# Altium PCB RFA433_r1.PcbDoc
Units mm, origin at the board's own origin, x right, y up, seen from the top; angles counter-clockwise.
Board outline 42.5 x 50 mm, 2 copper layers (Top Layer, Bottom Layer); 29 components, 13 nets, 74 pads, 47 vias.
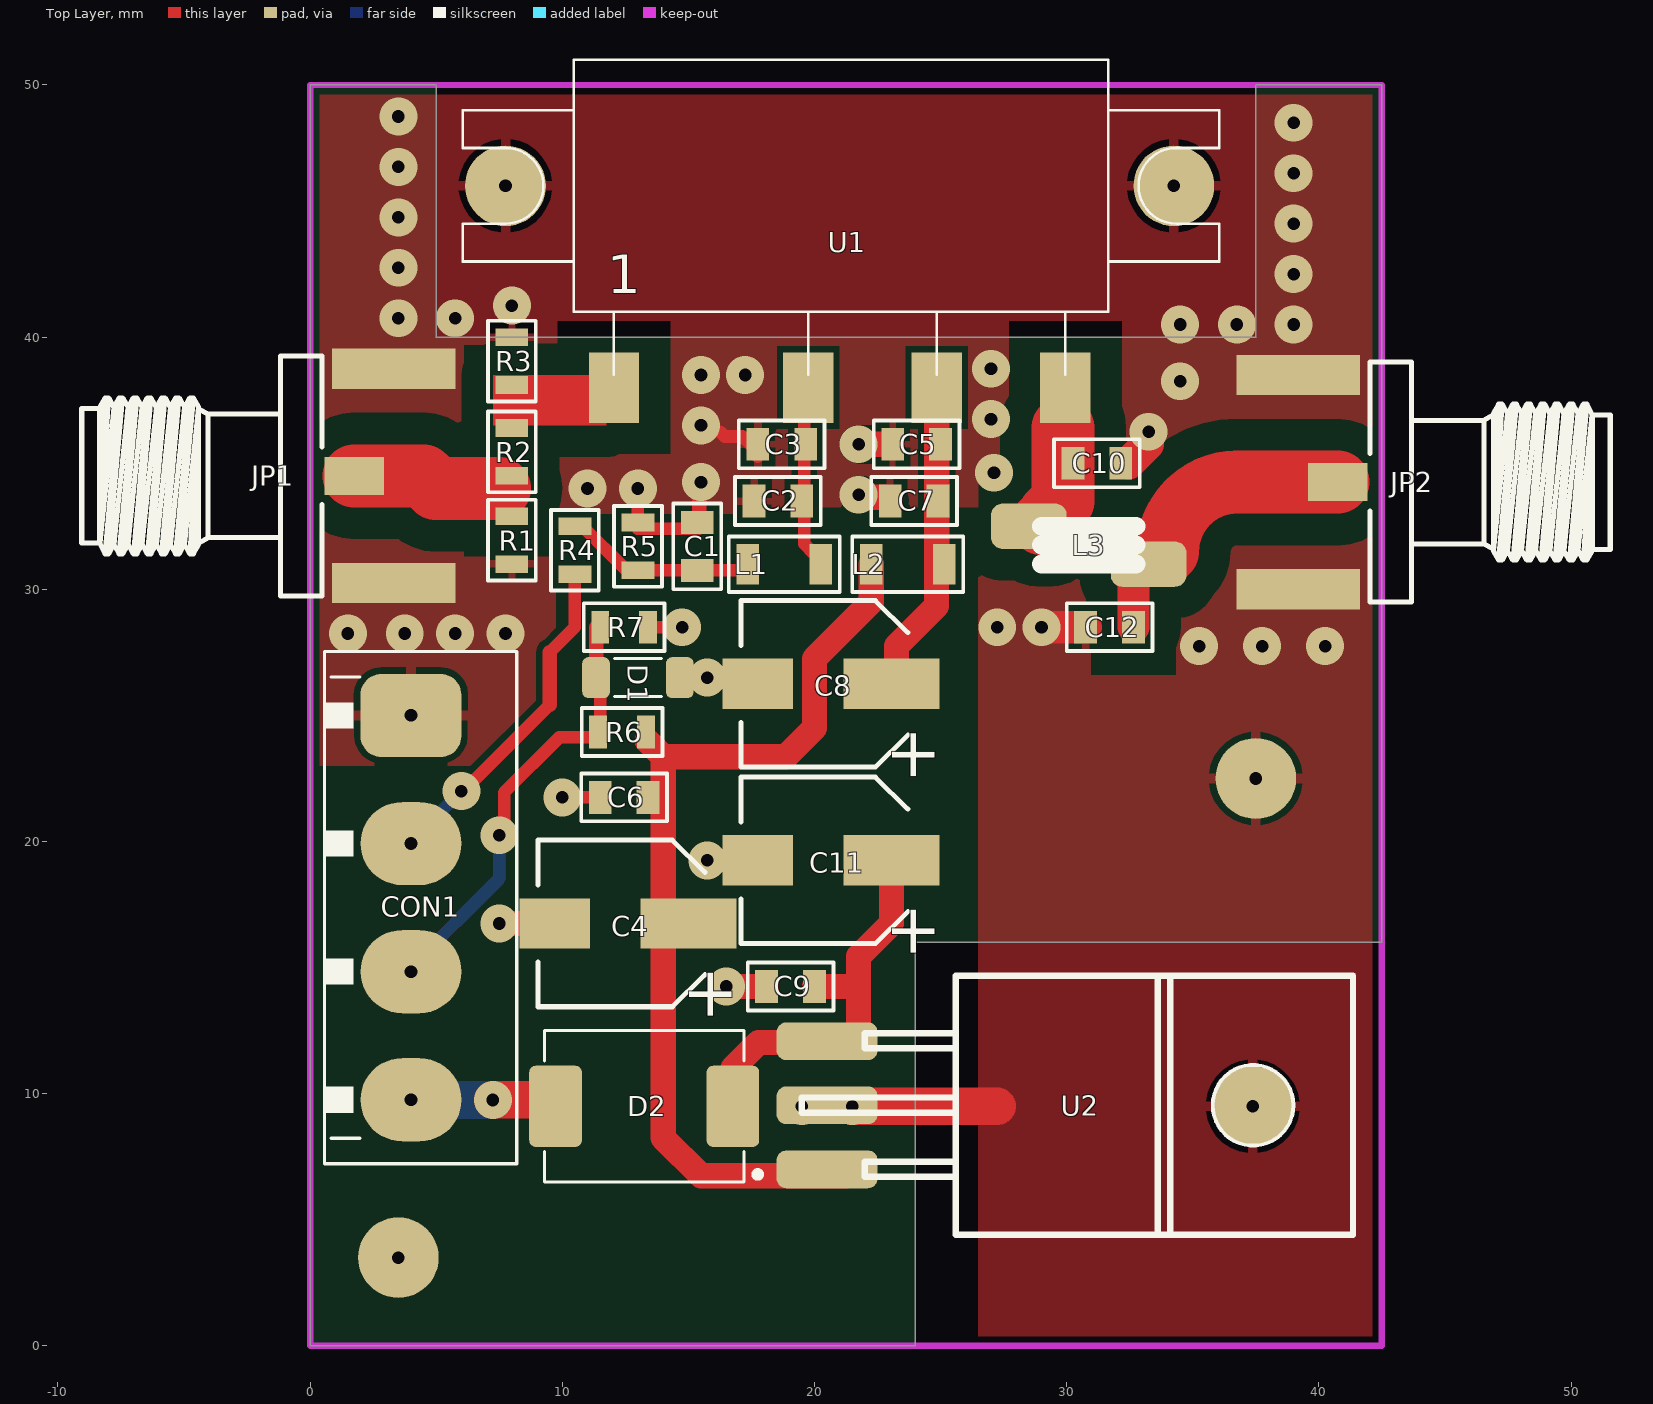
[diagram p0: Top Layer view]
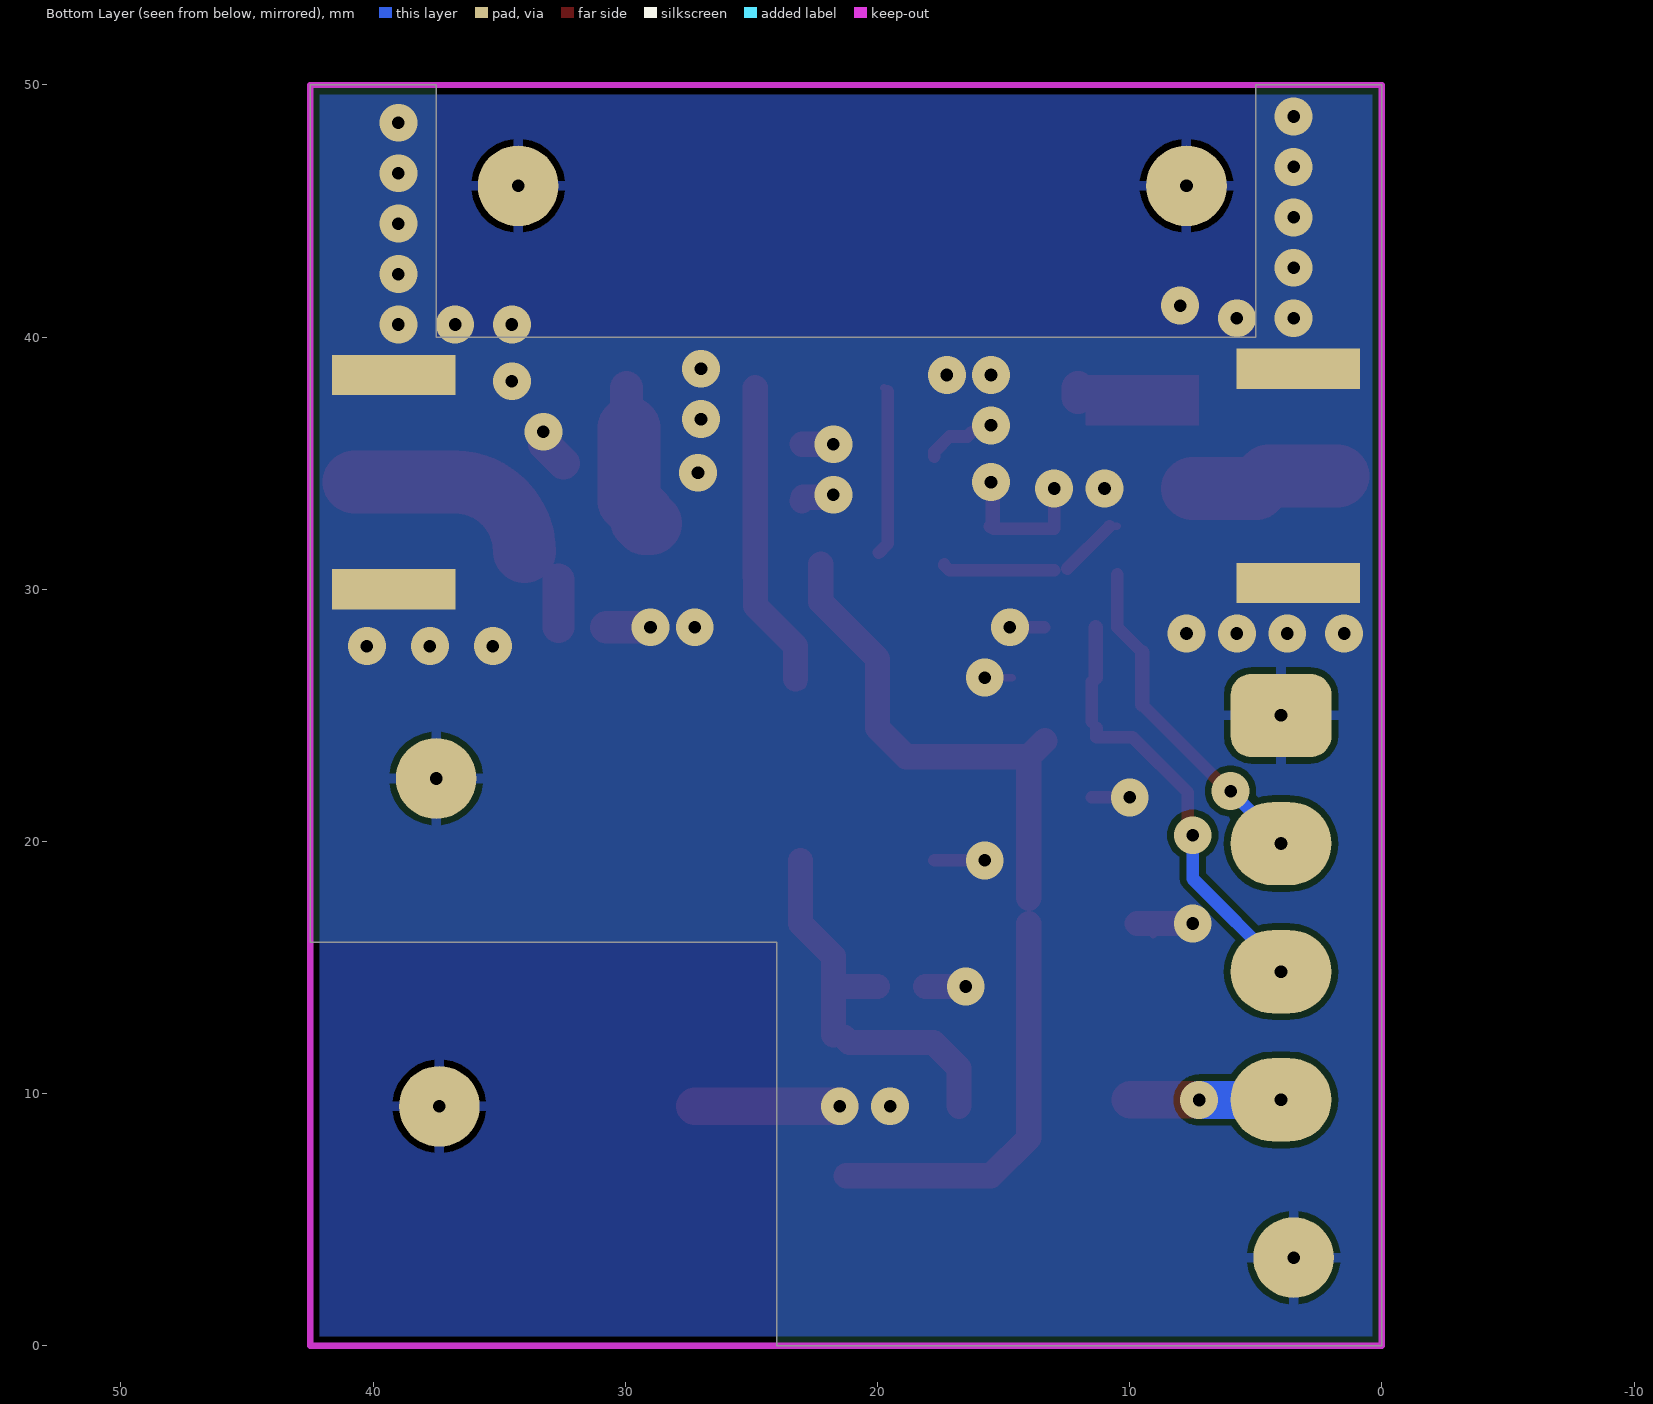
[diagram p1: Bottom Layer view, seen from below]

## Layer stack, top to bottom
Top Solder: solder mask 0.0102, Solder Resist, Dk 3.5
Top Layer: signal copper 0.0356
Dielectric 1: dielectric 0.32, FR-4, Dk 4.8
Bottom Layer: signal copper 0.0356
Bottom Solder: solder mask 0.0102, Solder Resist, Dk 3.5

## Board outline
0,0 0,50 5,50 5,40 37.5,40 37.5,50 42.5,50 42.5,16 24,16 24,0

## Design rules (kind name [scope] priority, off if disabled: settings)
Clearance Clearance_5 [InNet('NetJP1_1') vs InNet('GND')] p1: gap=1.25 ignorepadtopadclearanceinfootprint=FALSE
Clearance Clearance_4 [InNet('NetR2_2') vs InNet('GND')] p2: gap=1.25 ignorepadtopadclearanceinfootprint=FALSE
Clearance Clearance_3 [InNamedPolygon('GND_L01_P003') vs InNet('GND')] p3: gap=1.25 ignorepadtopadclearanceinfootprint=FALSE
Clearance Clearance_2 [InNamedPolygon('GND_L01_P002') vs InNet('NetC10_1')] p4: gap=1.25 ignorepadtopadclearanceinfootprint=FALSE
Clearance Clearance_1 [InNamedPolygon('GND_L01_P002') vs InNet('NetC12_1')] p5: gap=1.25 ignorepadtopadclearanceinfootprint=FALSE
Clearance [All] p6: gap=0.254 ignorepadtopadclearanceinfootprint=FALSE except(0: Arc-Hole Track-Hole SMDPad-Hole THPad-Hole Via-Hole Fill-Hole Poly-Hole Region-Hole Text-Hole)
ComponentClearance [All] p1: gap=0.1 collisioncheckmode=3 verticalgap=0.254 showdistances=FALSE
MinimumSolderMaskSliver [All] p1: minsoldermaskwidth=0
PolygonConnect PolygonConnect_5 [All vs IsNamedPolygon('GND_L01_P004')] p1: thpad.connectstyle=Relief thpad.reliefconductorwidth=0.254 thpad.reliefentries=4 thpad.polygonreliefangle="90 Angle" thpad.airgapwidth=0.254 smdpad.connectstyle=Relief smdpad.reliefconductorwidth=0.254 smdpad.reliefentries=4 smdpad.polygonreliefangle="90 Angle" smdpad.airgapwidth=0.254 via.connectstyle=Direct via.reliefconductorwidth=0.254 via.reliefentries=4 via.polygonreliefangle="90 Angle" via.airgapwidth=0.254
PolygonConnect PolygonConnect_4 [InComponent('JP1') or InComponent('JP2') vs IsNamedPolygon('GND_L02_P000')] p2: connectstyle=Direct reliefconductorwidth=0.254 reliefentries=4 polygonreliefangle="90 Angle" airgapwidth=0.254
PolygonConnect PolygonConnect_3 [InComponent('JP1') vs IsNamedPolygon('GND_L01_P001')] p3: connectstyle=Direct reliefconductorwidth=0.254 reliefentries=4 polygonreliefangle="90 Angle" airgapwidth=0.254
PolygonConnect PolygonConnect_2 [InComponent('JP2') vs IsNamedPolygon('GND_L01_P002')] p4: connectstyle=Direct reliefconductorwidth=0.254 reliefentries=4 polygonreliefangle="90 Angle" airgapwidth=0.254
PolygonConnect PolygonConnect_1 [All vs IsNamedPolygon('GND_L01_P001') Or IsNamedPolygon('GND_L01_P002') Or IsNamedPolygon('GND_L01_P003') Or IsNamedPolygon('GND_L02_P000')] p5: thpad.connectstyle=Relief thpad.reliefconductorwidth=0.4 thpad.reliefentries=4 thpad.polygonreliefangle="90 Angle" thpad.airgapwidth=0.25 smdpad.connectstyle=Relief smdpad.reliefconductorwidth=0.3 smdpad.reliefentries=4 smdpad.polygonreliefangle="90 Angle" smdpad.airgapwidth=0.25 via.connectstyle=Direct via.reliefconductorwidth=0.254 via.reliefentries=4 via.polygonreliefangle="90 Angle" via.airgapwidth=0.254
PolygonConnect [All] p6: connectstyle=Relief reliefconductorwidth=0.254 reliefentries=4 polygonreliefangle="90 Angle" airgapwidth=0.254
RoutingVias [All] p1: holewidth=0.711 width=1.27 viastyle="Through Hole" minholewidth=0.711 minwidth=1.27 maxholewidth=0.711 maxwidth=1.27
SilkToSilkClearance [All] p1: silktosilkclearance=0
SilkToSolderMaskClearance [IsPad] p1: minsilkscreentomaskgap=0 clearancetoexposedcopper=TRUE
SolderMaskExpansion [All] p1: expansion=0.102 istentingtop=FALSE
Width [All] p1: maxlimit=3 minlimit=0.3 preferedwidth=0.5
26 further rules are at their usual default settings.

## Components (designator, comment, footprint, x,y, rotation, side; value= is the part's Value field where it differs from the comment)
C1 "2u2" C-0805 15.35,32.65 r270 top
C2 "2u2" C-0805 19.5,33.5 r180 top
C3 "1n" C-0805 19.65,35.75 r180 top
C4 "47u 16V" ECAPSMD6377 15,16.75 r180 top
C5 "100p" C-0805 25,35.75 r180 top
C6 "100n" C-0805 13.4,21.75 r180 top
C7 "100n" C-0805 24.9,33.5 r180 top
C8 "47u 16V" ECAPSMD6377 23.05,26.25 r180 top
C9 "100n" C-0805 18.1,14.25 r0 top
C10 "10p" C-0805 30.25,35 r0 top
C11 "100u 25V" ECAPSMD6377 23.05,19.25 r180 top
C12 "10p" C-0805 32.65,28.5 r180 top
CON1 "KLS2-301-5.0-04P" KLS2-301-5.0-04P 4,25 r270 top
D1 "BZV55-3V3" SOD-80_NUM 13,26.5 r0 top
D2 "SS34" D_SMC 13.25,9.5 r180 top
JP1 "SMA-F" AMPHENOL_132357-11 1.75,34.5 r0 top
JP2 "SMA-F" AMPHENOL_132357-11 40.75,34.25 r180 top
L1 "BEAD" R-1206 17.35,31 r0 top
L2 "BEAD" R-1206 22.25,31 r0 top
L3 "17nH" 2.75TD3.0W0.7_SMD 32.75,31 r90 top
R1 "nc" R-0805 8,31 r90 top
R2 "0" R-0805 8,34.5 r90 top
R3 "nc" R-0805 8,40 r270 top
R4 "100" R-0805 10.5,30.6 r90 top
R5 "100k" R-0805 13,32.65 r270 top
R6 "nc" R-0805 11.419,24.344 r0 top
R7 "nc" R-0805 13.4,28.5 r180 top
U1 "RA07H3340M" H46 12.05,38 r0 top
U2 "7812" TO-220/HOR_FLAT 20.5,12.08 r270 top

## Footprints (in the part's own frame and the unit in brackets; to place one, negate y for a bottom-side part, rotate by r counter-clockwise, add the part's x,y. Pads: shape width x height; smd on the part's side, far side on the other; paste and mask are expansions set on the pad)
2.75TD3.0W0.7_SMD [mm]
  rrect50% 1.8x3 smd: 1(0,-0.5) 2(1.5,4.25)
  silkscreen extent 0,0 1.5,3.75
AMPHENOL_132357-11 [mm] "SMA End Launch Jack for 1.58mm PCB, 50 Ohm, Flat Tab Contact"
  rect 2.35x1.5 smd: 1(0,0)
  rect 4.9x1.6 smd: 2(1.575,-4.25) 2(1.575,4.25)
  rect 4.9x1.6 smd far side: 2(1.575,-4.25) 2(1.575,4.25)
  silkscreen extent -10.81,-4.76 -1.28,4.76, body extent -10.8,-4.76 3.48,4.76, height 4.08
C-0805 [mm]
  rect 0.9x1.3 smd: 1(0,0) 2(1.9,0)
  silkscreen extent -0.75,-0.95 2.65,0.95
D_SMC [mm] "Diode, Molded Body; 7.30 mm L X 5.80 mm W X 2.50 mm H body"
  rrect24% 2.09x3.22 smd: 1(3.515,0) 2(-3.515,0)
  silkscreen extent -4.63,-3 3.95,3, body extent -4,-2.95 4,2.95, height 2.31
ECAPSMD6377 [mm]
  rect 3.8x2 smd: 1(0,0)
  rect 2.8x2 smd: 2(5.3,0)
  silkscreen extent -0.65,-3.3 5.97,3.3, body extent -1.36,-3.3 6.44,3.3, height 7.7
H46 [mm]
  rect 2x2.8 smd: 1(0,0) 2(7.7,0) 3(12.8,0) 4(17.9,0)
  silkscreen extent -6,0.5 24,13, body extent -5.98,-0.94 24.02,12.75, height 5.4
KLS2-301-5.0-04P [mm]
  rrect50% 3.3x4 hole 0.5: 1(0,0)
  oval 3.3x4 hole 0.5: 2(5.08,0) 3(10.16,0) 4(15.24,0)
  silkscreen extent -2.54,-3.43 17.78,4.19, body extent -2.65,-4 17.5,4, height 10
R-0805 [mm]
  rect 0.7x1.3 smd: 1(0,0) 2(1.9,0)
  silkscreen extent -0.65,-0.95 2.55,0.95
R-1206 [mm]
  rect 0.9x1.6 smd: 1(0,0) 2(2.9,0)
  silkscreen extent -0.75,-1.1 3.65,1.1
SOD-80_NUM [mm]
  rrect45% 1.1x1.63 smd: 1(1.66,0) 2(-1.66,0)
  silkscreen extent -0.93,-0.75 0.93,0.75, body extent -1.73,-0.7 1.73,0.7, height 1.4
TO-220/HOR_FLAT [mm]
  rrect50% 1.5x4 smd: 1(0,0) 2(2.54,0) 3(5.08,0)
  silkscreen extent -2.59,-1 7.67,20.85, body extent -2.59,2.24 7.67,21.98, height 4.44

## Part data
C1 C2 C3 C5 C6 C7 C9 C10 C12: library part CAPN, Voltage=50V, Вид=Конденсатор, Точність/група=NP0
C4 C8 C11: library part CAPP_1, Voltage=16V, Вид=Конденсатор
D1: library part DIODZ, Вид=Стабілітрон
D2: library part DIODSH, Вид=Діод
JP1 JP2: library part "RF connector", "RF Connector", Вид=Роз'єм
L3: library part L, Вид=Індуктивність
R1 R2 R3 R4 R5 R6 R7: library part RES, Вид=Резистор, Точність/група=5%
U1: "RF pwer amplifier"
U2: library part 7805, "12V voltage regulator", Вид=Мікросхема
L1 L2: Вид="Ferrite bead"

## Free pads (board coordinates)
  round 3.2 hole 0.5: 0(3.5,3.5) 0(7.75,46) 0(34.25,46) 0(37.375,9.5) 0(37.5,22.5)

## Via types
v1: diameter 1.5, hole 0.5, Top Layer to Bottom Layer, 47 vias

## Nets (pads, with @x,y where several pads share a name; then routed paths per layer and width w, separated by ;. In a path a pad name is that pad's centre, name@x,y a point inside that pad or via, vN(x,y) a via of type N, cw(c..) or ccw(c..) an arc to the next point about the centre after c; other vN are vias at no path point)
+12V: C4.1 C6.1 L2.1 R6.2 U2.3 | length 37.1
  Top Layer w0.3: U2.3@21.25,6.75 U2.3@21.5,7
  Top Layer w1: R6.2@13.364,24 14,23.364 ; C4.1@14,16.75 14,8.25 15.5,6.75 U2.3@21.25,6.75 ; 14,17.751 14,23.364 ; L2.1 22.25,29.5 20,27.25 20,24.5 18.864,23.364 14,23.364
GND: C1.1 C2.2 C3.2 C4.2 C5.2 C6.2 C7.2 C8.2 C9.1 C10.2 C11.2 C12.2 CON1.1 D1.1 JP1.2 JP2.2 pad.0 R1.1 R3.1 R5.1 R7.1 U2.2 | length 30.7
  Top Layer w0.3: C4.2@9,16.372 C4.2@9.069,16.303 ; D1.1 v1(15.75,26.5) ; C1.1@15.4,32.4 C1.1@15.5,32.5 ; v1@9.829,21.75 10,21.579 v1(10,21.75) v1@9.829,21.75
  Top Layer w0.5: v1(10,21.75) C6.2 ; v1(13,34) R5.1 13,32.4 C1.1@15.4,32.4 ; R7.1 v1(14.75,28.5) ; v1@15.5,19.25 C11.2 ; 16.25,36.25 16.441,36.059 17.141,36.059 17.75,35.45 C3.2@17.75,35.25 ; 27.25,9.5 27.5,9.75
  Top Layer w0.58: C1.1@15.5,32.5 15.425,32.575 15.425,34.175 v1(15.5,34.25)
  Top Layer w1: v1(7.5,16.75) C4.2 ; v1(16.5,14.25) C9.1 ; v1(21.75,33.75) 21.885,33.75 21.985,33.65 22.95,33.65 22.95,33.55 C7.2 ; v1(21.75,35.75) C5.2@22.987,35.75
  Top Layer w1.3: v1(29,28.5) C12.2 ; C10.2@32.45,35 33.212,35.762 33.212,36.212 v1(33.25,36.25)
  Top Layer w1.5: v1(21.5,9.5) 27.25,9.5
  other v1: 19.5,9.5 15.75,19.25 35.25,27.75 37.75,27.75 40.25,27.75 1.5,28.25 3.75,28.25 5.75,28.25 7.75,28.25 27.25,28.5 11,34 27.117,34.625 15.5,36.5 27,36.75 34.5,38.25 15.5,38.5 17.25,38.5 27,38.75 34.5,40.5 36.75,40.5 39,40.5 3.5,40.75 5.75,40.75 8,41.25 39,42.5 3.5,42.75 39,44.5 3.5,44.75 39,46.5 3.5,46.75 39,48.5 3.5,48.75
NetC2_1: C2.1 C3.1 L1.2 U1.2 | length 6.8
  Top Layer w0.3: U1.2@19.6,37.85 U1.2
  Top Layer w0.5: U1.2@19.6,37.85 19.6,31.8 L1.2@19.95,31.45
NetC5_1: C5.1 C7.1 C8.1 L2.2 U1.3 | length 12.5
  Top Layer w0.5: C8.1 C8.1@23.25,26.45 ; L2.2@24.843,30.493 L2.2@24.85,30.5
  Top Layer w1: C8.1@23.25,26.45 23.25,27.75 24.843,29.343 L2.2@24.843,30.493 ; L2.2@24.85,30.5 24.85,32.75 24.85,35.25 U1.3
NetC9_2: C9.2 C11.1 D2.2 U2.1 | length 16.4
  Top Layer w0.3: U2.1@21.33,12.25 21.5,12.08 U2.1@21.75,12.33
  Top Layer w1: D2.2 16.765,11.015 17.783,12.033 21.113,12.033 U2.1@21.33,12.25 ; C9.2 21.75,14.25 ; U2.1@21.75,12.33 21.75,14.25 ; C11.1 23.05,16.75 21.75,15.45 21.75,14.25
NetC10_1: C10.1 L3.2 U1.4 | length 5.8
  Top Layer w1.3: L3.2@29.212,32.612 L3.2@29.35,32.75 ; 29.95,36.5 U1.4
  Top Layer w2.5: L3.2@29,32.612 L3.2@29.212,32.612 ; L3.2@29.35,32.75 29.35,33.012 29.85,33.512 29.85,35 29.85,36.4
NetC12_1: C12.1 JP2.1 L3.1 | length 11.2
  Top Layer w0.3: C12.1 C12.1@32.75,28.6
  Top Layer w0.5: L3.1@32.65,30.4 L3.1
  Top Layer w1.25: C12.1 L3.1@32.65,30.4
  Top Layer w2.5: L3.1@34,31.5 cw(c36.75,31.5) 36.75,34.25 JP2.1
NetCON1_2: CON1.2 R4.1 | length 13.4
  Top Layer w0.3: CON1.2 CON1.2@4,20
  Top Layer w0.5: v1@6.04,21.96 9.5,25.42 ; 9.5,27.5 10.5,28.5 R4.1
  Top Layer w0.58: 9.5,25.42 9.5,27.5
  Bottom Layer w0.5: CON1.2@4,20 v1(6,22)
NetCON1_3: CON1.3 D1.2 R6.1 R7.2 | length 17.7
  Top Layer w0.3: R6.1@11.25,24.5 R6.1@11.5,24.75 ; D1.2 D1.2@11.5,26.34
  Top Layer w0.5: v1(7.5,20.25) 7.691,20.441 7.691,21.941 9.885,24.135 11.319,24.135 R6.1@11.319,24.5 ; R6.1@11.5,24.75 D1.2@11.5,26.34
  Top Layer w0.58: D1.2 R7.2@11.34,28.5
  Bottom Layer w0.5: CON1.3 4,15.023 7.5,18.523 v1(7.5,20.25)
NetJP1_1: JP1.1 R1.2 R2.1 | length 6
  Top Layer w2.5: JP1.1 4.5,34.5 5,34 7.5,34
NetR2_2: R2.2 R3.2 U1.1 | length 0.4
  Top Layer w1.3: U1.1@12.05,37.6 U1.1
VBAT: CON1.4 D2.1 | length 6.3
  Top Layer w0.3: D2.1@9.975,9.76 D2.1@10.235,9.5
  Top Layer w1.5: v1@7.25,9.76 D2.1@9.975,9.76
  Bottom Layer w0.3: CON1.4 CON1.4@4.005,9.755 ; v1@7.245,9.755 v1(7.25,9.75)
  Bottom Layer w1.5: CON1.4@4.005,9.755 v1@7.245,9.755
VGG: C1.2 L1.1 R4.2 R5.2 | length 7.3
  Top Layer w0.3: R4.2 R4.2@10.8,32.5 ; R5.2@12.477,30.723 R5.2@12.477,30.823
  Top Layer w0.5: R4.2@10.8,32.5 R5.2@12.477,30.823 ; R5.2 C1.2 17.15,30.75 17.35,30.95 L1.1

## Polygon pours and split planes (outlines as drawn)
GND on Top Layer "GND_L01_P004" (solid, pour order 4): 9,49.612 9,33.25 26.5,33.25 26.5,49.612
GND on Top Layer "GND_L01_P003" (solid, remove dead copper, pour order 3): 9,33 18.25,33 18.25,39.504 9,39.504
GND on Top Layer "GND_L01_P002" (solid, remove dead copper, pour order 2): 26.5,40 26.5,0 42.5,0 42.5,50 26.5,50
GND on Top Layer "GND_L01_P001" (solid, remove dead copper, pour order 1): 0,23 9.75,23 9.75,50 0,50
GND on Bottom Layer "GND_L02_P000" (solid, remove dead copper, pour order 0): 0,0 42.5,0 42.5,16 42.5,50 37.5,50 5,50 0,50

## Keep-outs
Keep-Out Layer:
  lines w0.254: 0,0 0,50 5,50 37.5,50 42.5,50 42.5,16 42.5,0 0,0

## Other copper
Top Layer:
  rectangle net NetR2_2: 7.25,36.5 11.75,38.5
  pour cut-out: 29.425,33.037 29.425,30.5 33,30.5 33,33
  pour cut-out: 7,35 7,33.75 8.5,33.75 8.5,35

## Text inside footprints (layer, text, board x,y; h text height)
C4: Top Overlay "+" at 15.038,15.065 h1.98 r270; Mechanical 1 "+" at 15.038,15.065 h1.98 r270
C8: Top Overlay "+" at 23.088,24.565 h1.98 r270; Mechanical 1 "+" at 23.088,24.565 h1.98 r270
C11: Top Overlay "+" at 23.088,17.565 h1.98 r270; Mechanical 1 "+" at 23.088,17.565 h1.98 r270
U1: Top Overlay "1" at 11.79,41.75 h1.52